# EAGLE board RSP2NRF (EAGLE 7.1.0)
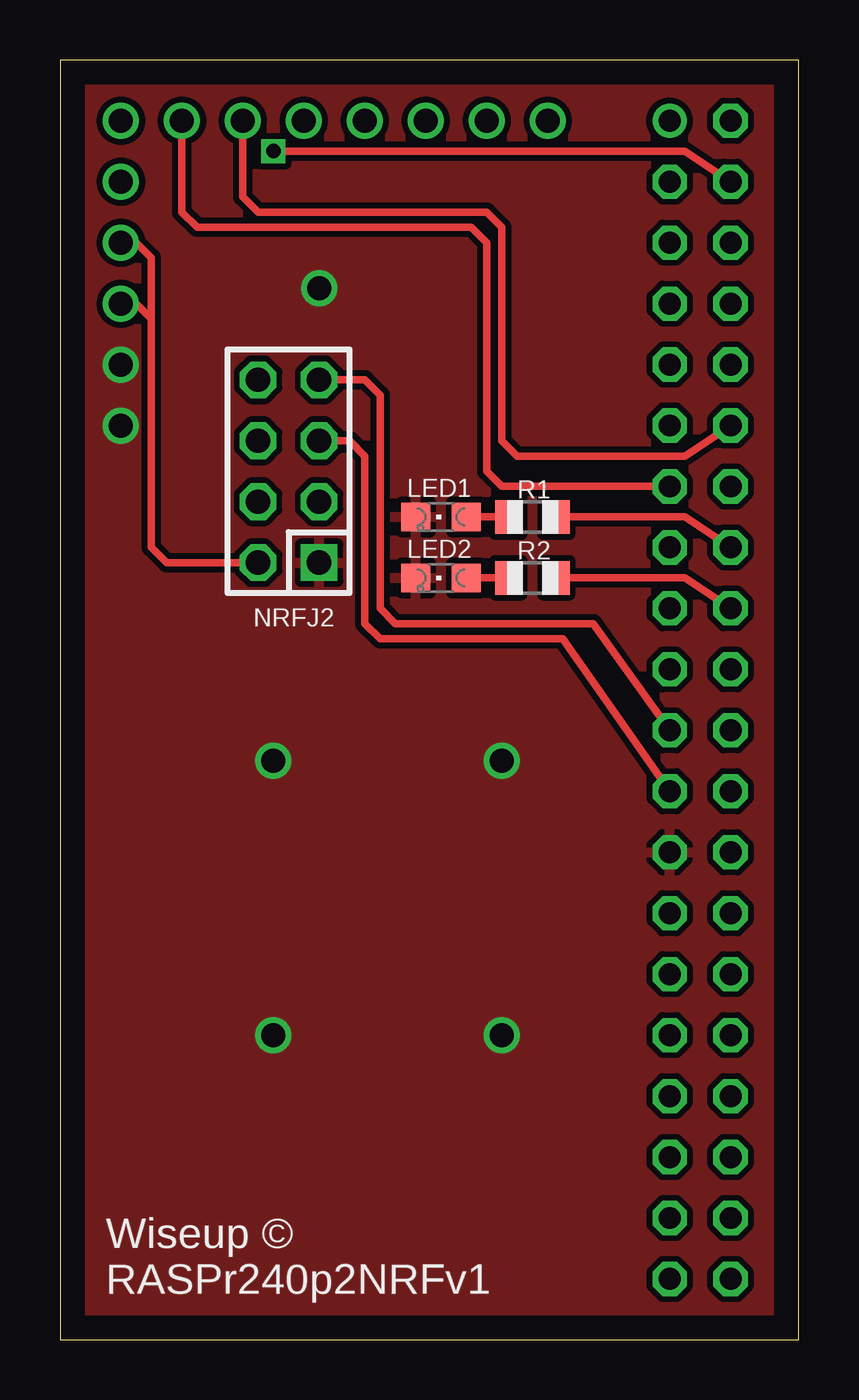
[diagram p0: board, top side]
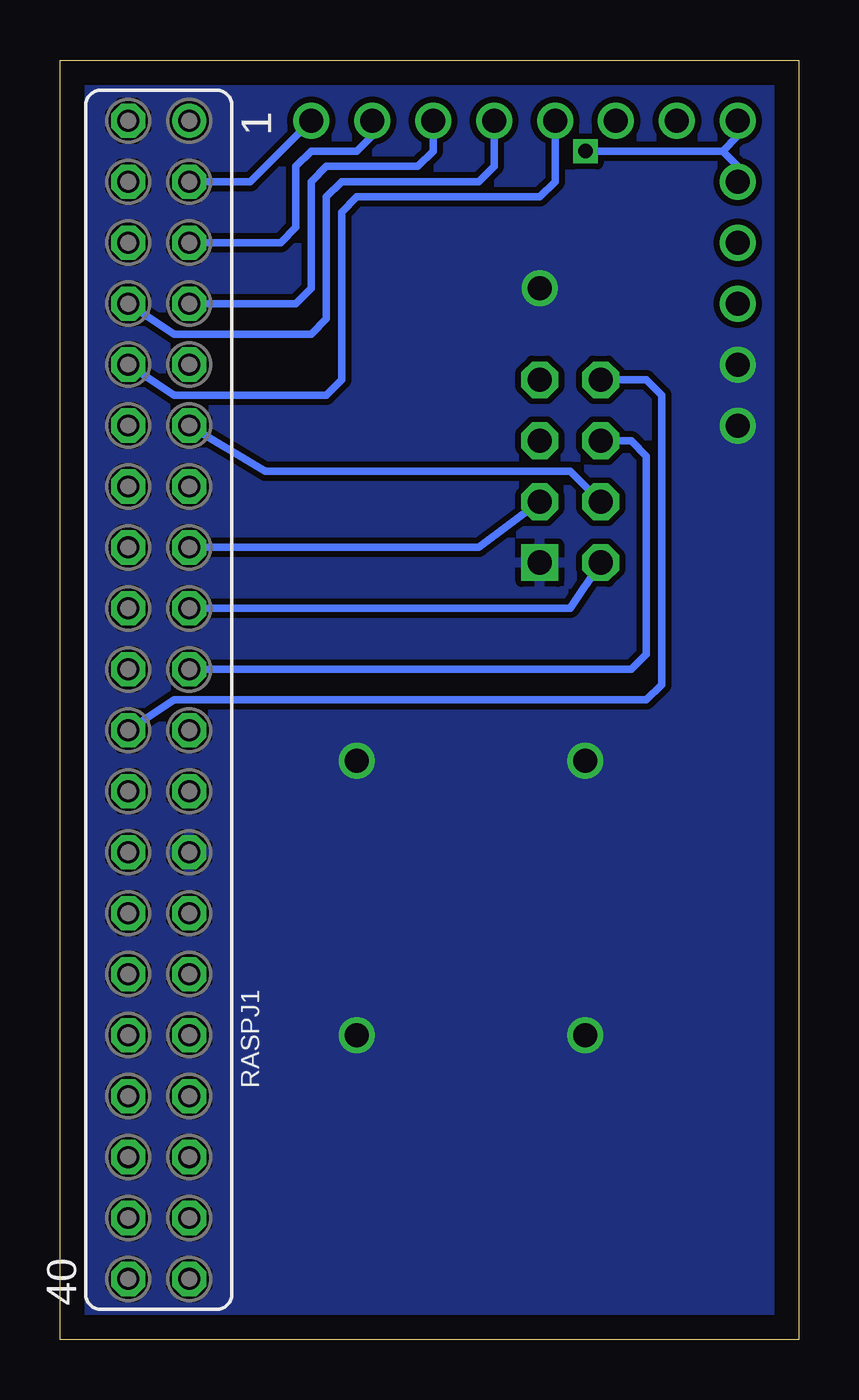
[diagram p1: board, bottom side, seen from below]

Size 30.79 x 53.33 mm. Coordinates in mm from the lower left corner, seen from the top.
Outline: 0,0 30.79,0 30.79,53.33 0,53.33 0,0
Copper layers (1*16): Top 0.035mm / dielectric 1.5mm / Bottom 0.035mm
Design rules "default": minimum track width 10mil, minimum drill 24mil, track to track 8mil, track to pad 8mil, pad to pad 8mil, via to via 8mil, smd to smd 8mil, copper to edge 40mil, drill to drill 8mil, minimum pad ring 10mil, minimum via ring 8mil, stop-mask expansion 4mil, vias tented up to drill 0mil, thermal gap 10mil
Net classes: 0 default: width 0.305 mm, drill 0.508 mm, clearance 0.254 mm

## Footprints (pad centres in the part's own frame; a part is rotated, then mirrored left to right if it is on the bottom)
CHIPLED_0805 = smd 1.2 x 1.2: A 0,-1.05; C 0,1.05
DIL-100-2X04 = drill 1.016 square: 1 -3.81,-1.27 | drill 1.016 octagon: 2 -3.81,1.27; 3 -1.27,-1.27; 4 -1.27,1.27; 5 1.27,-1.27; 6 1.27,1.27; 7 3.81,-1.27; 8 3.81,1.27
R0805 = smd 1.1 x 1.4: 1 -1,0; 2 1,0
FE20-2 = drill 0.914: 1 -24.13,1.27 | drill 0.914 octagon: 2 -24.13,-1.27; 3 -21.59,1.27; 4 -21.59,-1.27; 5 -19.05,1.27; 6 -19.05,-1.27; 7 -16.51,1.27; 8 -16.51,-1.27; 9 -13.97,1.27; 10 -13.97,-1.27; 11 -11.43,1.27; 12 -11.43,-1.27; 13 -8.89,1.27; 14 -8.89,-1.27; 15 -6.35,1.27; 16 -6.35,-1.27; 17 -3.81,1.27; 18 -3.81,-1.27; 19 -1.27,1.27; 20 -1.27,-1.27; 21 1.27,1.27; 22 1.27,-1.27; 23 3.81,1.27; 24 3.81,-1.27; 25 6.35,1.27; 26 6.35,-1.27; 27 8.89,1.27; 28 8.89,-1.27; 29 11.43,1.27; 30 11.43,-1.27; 31 13.97,1.27; 32 13.97,-1.27; 33 16.51,1.27; 34 16.51,-1.27; 35 19.05,1.27; 36 19.05,-1.27; 37 21.59,1.27; 38 21.59,-1.27; 39 24.13,1.27; 40 24.13,-1.27

## Placement (x,y rotation side)
LED1  [CHIPLED_0805]  15.88,34.29 90 top
LED2  [CHIPLED_0805]  15.88,31.75 90 top
NRFJ2  F-2X04-DIL-100  [DIL-100-2X04]  9.52,36.2 90 top
R1  1k  [R0805]  19.69,34.29 180 top
R2  1k  [R0805]  19.69,31.75 180 top
RASPJ1  [FE20-2]  26.67,26.67 270 bottom

## Library data of the parts
LED1 LED2 R1 R2 = adafruit
NRFJ2 = con-headers-jp
RASPJ1 = con-lsta; OC_FARNELL: unknown; OC_NEWARK: unknown

## Nets
GND: LED1.C LED2.C NRFJ2.1 RASPJ1.25
IRQ: NRFJ2.8 RASPJ1.22
N$1: NRFJ2.5 RASPJ1.23
N$2: NRFJ2.7 RASPJ1.21
N$3: NRFJ2.6 RASPJ1.19
N$4: RASPJ1.4
N$6: R2.1 RASPJ1.18
N$7: NRFJ2.4 RASPJ1.11
N$8: NRFJ2.3 RASPJ1.15
N$9: LED2.A R2.2
N$10: R1.1 RASPJ1.16
N$11: LED1.A R1.2
N$18: RASPJ1.3
N$19: RASPJ1.5
N$20: RASPJ1.7
N$21: RASPJ1.8
N$22: RASPJ1.10
N$23: RASPJ1.12
S$2: RASPJ1.13
VCC: NRFJ2.2 RASPJ1.17

## Tracks (layer width: path | path; a pad name or v marks a point on that pad's centre or on a via)
GND  (via drill 1 pad 0.25)
  other vias: 8.89,24.13 10.8,43.81 18.41,24.13 2.54,38.1 8.89,12.7 18.41,12.7 2.54,40.64
  pour Top: -1.91,54.61 33.02,54.61 33.02,-1.27 -1.91,-1.27
  pour Bottom: -1.27,53.98 32.38,53.98 32.38,-0.64 -1.27,-0.64
IRQ
  Bottom 0.305: NRFJ2.8 6.35,40.01 5.72,39.37 5.72,27.3 6.35,26.67 26.04,26.67 RASPJ1.22
N$1
  Top 0.305: NRFJ2.5 12.07,37.47 12.7,36.83 12.7,29.84 13.34,29.21 20.96,29.21 RASPJ1.23
N$2
  Top 0.305: RASPJ1.21 22.23,29.84 13.97,29.84 13.34,30.48 13.34,39.37 12.7,40.01 NRFJ2.7
N$3
  Bottom 0.305: NRFJ2.6 6.99,37.47 6.35,36.83 6.35,28.57 6.99,27.94 RASPJ1.19
N$4  (via drill 0.6 pad 0.25, 1)
  Top 0.305: RASPJ1.4 26.04,49.53 v8.89,49.53
  Bottom 0.305: v8.89,49.53 3.17,49.53 | 3.17,49.53 2.54,50.16 v2.54,50.8 | 3.17,49.53 2.54,48.9 v2.54,48.26
N$6
  Top 0.305: RASPJ1.18 26.04,31.75 R2.1
N$7
  Bottom 0.305: NRFJ2.4 9.52,36.2 22.23,36.2 RASPJ1.11
N$8
  Bottom 0.305: NRFJ2.3 13.34,33.02 RASPJ1.15
N$9
  Top 0.305: R2.2 LED2.A
N$10
  Top 0.305: RASPJ1.16 26.04,34.29 R1.1
N$11
  Top 0.305: R1.2 LED1.A
N$18  (via drill 1 pad 0.25)
  Bottom 0.305: RASPJ1.3 22.86,48.26 v20.32,50.8
N$19  (via drill 1 pad 0.25)
  Bottom 0.305: RASPJ1.5 21.59,45.72 20.96,46.36 20.96,48.9 20.32,49.53 18.41,49.53 17.78,50.16 v17.78,50.8
N$20  (via drill 1 pad 0.25)
  Bottom 0.305: RASPJ1.7 20.96,43.18 20.32,43.81 20.32,48.26 19.69,48.9 15.88,48.9 15.24,49.53 v15.24,50.8
N$21  (via drill 1 pad 0.25)
  Bottom 0.305: RASPJ1.8 26.04,41.91 20.32,41.91 19.69,42.55 19.69,47.62 19.05,48.26 13.34,48.26 12.7,48.9 v12.7,50.8
N$22  (via drill 1 pad 0.25)
  Bottom 0.305: RASPJ1.10 26.04,39.37 19.69,39.37 19.05,40.01 19.05,46.99 18.41,47.62 10.8,47.62 10.16,48.26 v10.16,50.8
N$23  (via drill 1 pad 0.25)
  Top 0.305: RASPJ1.12 26.04,36.83 19.05,36.83 18.41,37.47 18.41,46.36 17.78,46.99 8.25,46.99 7.62,47.62 v7.62,50.8
S$2  (via drill 1)
  Top 0.305: RASPJ1.13 18.41,35.56 17.78,36.2 17.78,45.72 17.14,46.36 5.72,46.36 5.08,46.99 v5.08,50.8
VCC  (via drill 1)
  Top 0.305: NRFJ2.2 4.45,32.38 3.81,33.02 3.81,42.55 | 3.81,42.55 3.17,43.18 v2.54,43.18 | 3.81,42.55 3.81,45.09 3.17,45.72 v2.54,45.72
  Bottom 0.305: NRFJ2.2 9.52,30.48 RASPJ1.17

## Text on the board
tPlace: Wiseup © | RASPr240p2NRFv1